# Altium PCB PCB-CPU-fixe1.PcbDoc (part 2 of 3)
Units mil, origin at the board's own origin, x right, y up, seen from the top; angles counter-clockwise.
Board outline 6040 x 4120 mil, 6 copper layers (Top Layer, GND, Mid-Layer2, Mid-Layer3, VDD33, Bottom Layer); 111 components, 315 nets, 963 pads, 730 vias.
Unrouted connection lines stored in the file: 3.
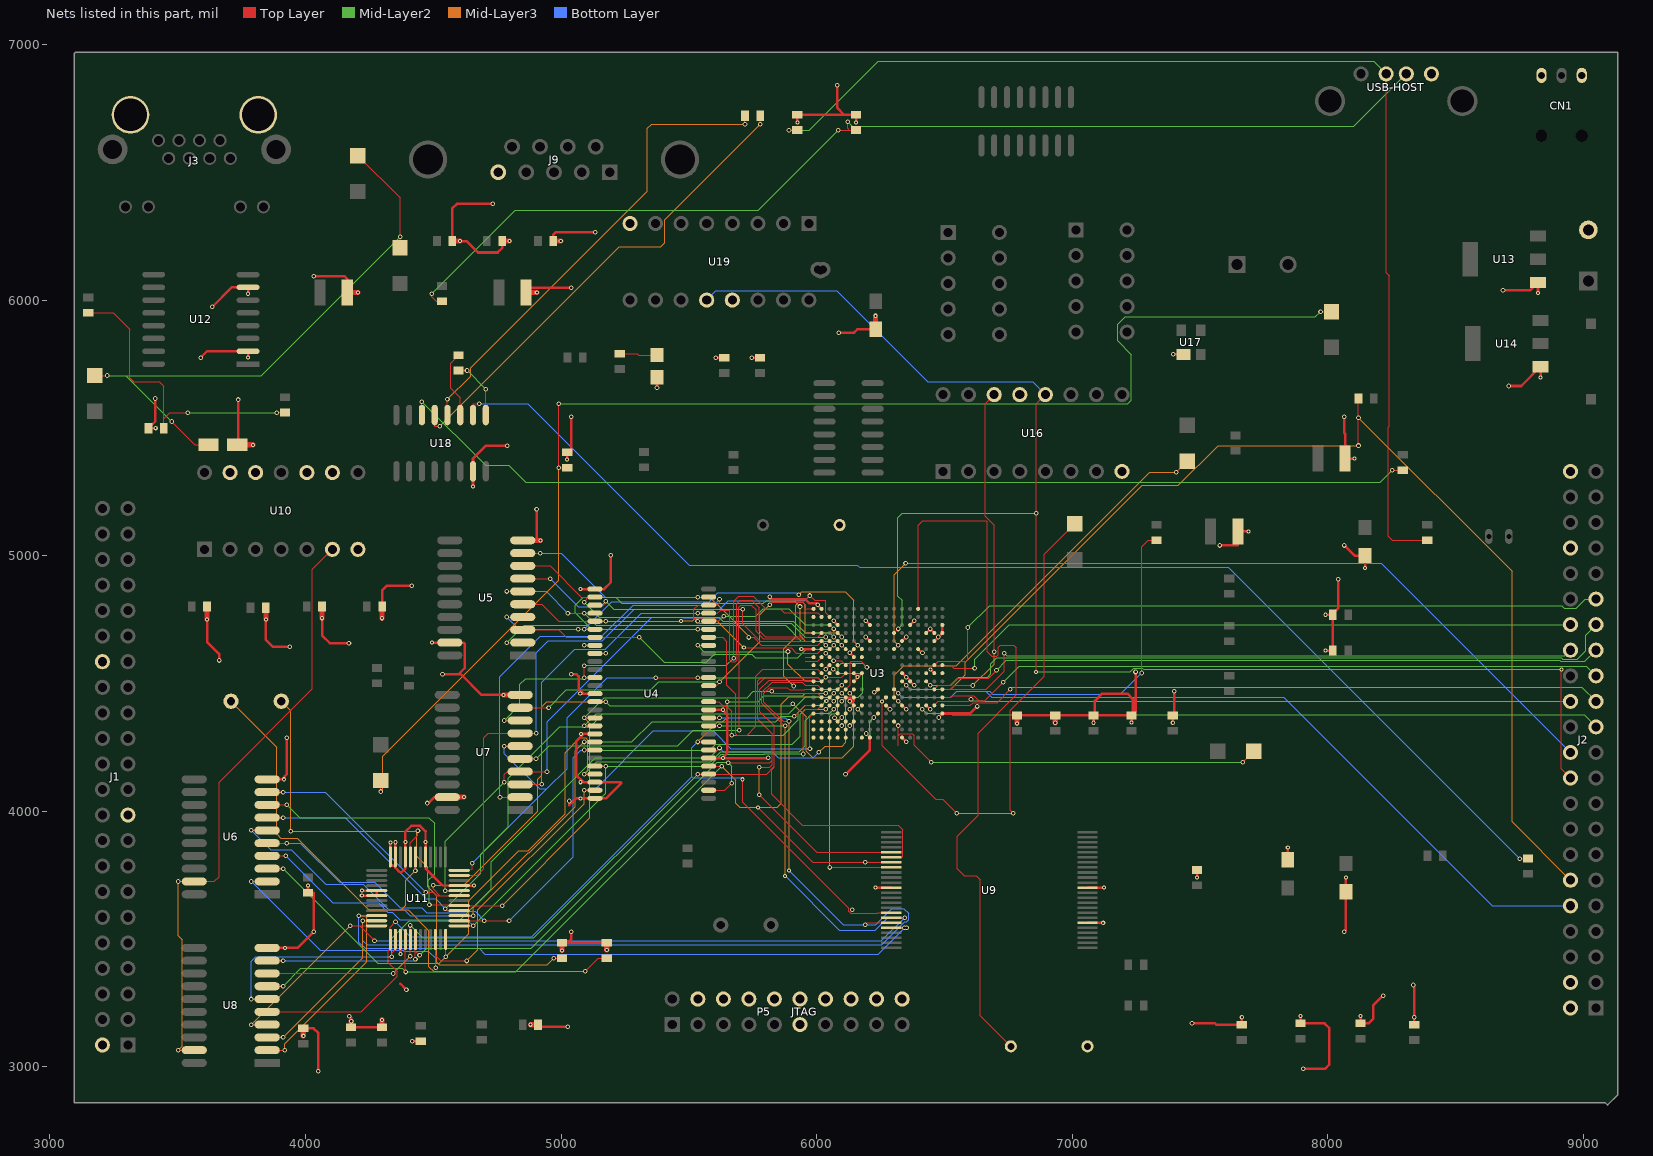
[diagram p6: the nets of this part, all layers, seen from the top]

## Via types
v1: diameter 18, hole 10, Top Layer to Bottom Layer, 574 vias
v2: diameter 16, hole 8, Top Layer to Bottom Layer, 155 vias
v3: diameter 16, hole 12, Top Layer to Bottom Layer, 1 vias

## Nets (pads, with @x,y where several pads share a name; then routed paths per layer and width w, separated by ;. In a path a pad name is that pad's centre, name@x,y a point inside that pad or via, vN(x,y) a via of type N, cw(c..) or ccw(c..) an arc to the next point about the centre after c; other vN are vias at no path point) (continued)
GND: "P5      JTAG.4" "P5      JTAG.6" "P5      JTAG.8" "P5      JTAG.10" "P5      JTAG.11" "P5      JTAG.12" "P5      JTAG.14" "P5      JTAG.16" "P5      JTAG.18" "P5      JTAG.20" C1.1 C2.1 C3.2 C4.2 C5.2 C6.2 C7.2 C8.2 C9.2 C10.2 C11.2 C12.2 C13.2 C14.2 C15.2 C16.2 C17.2 C18.2 C19.2 C20.2 C21.2 C22.2 C23.2 C24.1 C25.2 C26.2 C27.2 C28.2 C29.2 C30.2 C31.2 C32.2 C44.2 C46.2 C47.2 C48.2 C49.2 C50.2 C51.2 C52.2 CN1.1 CN1.3 D1.2 J1.2 J1.19 J1.32 J2.2 J2.4 J2.38 J2.44 J3.13 J3.14 J9.5 R9.1 R18.1 R29.2 R30.2 S2.2 U3.A12 U3.B17 U3.C10 U3.D3 U3.D15 U3.E6 U3.F3 U3.F5 U3.F6 U3.F8 U3.F9 U3.F11 U3.F12 U3.G9 U3.H1 U3.H13 U3.H15 U3.J7 U3.K5 U3.M1 U3.M5 U3.M9 U3.M13 U3.N8 U3.N15 U3.P12 U3.R5 U3.R14 U3.T9 U3.T13 U3.T14 U3.U4 U3.U14 U3.U15 U4.6 U4.12 U4.28 U4.41 U4.46 U4.52 U4.54 U5.10 U5.19 U6.10 U7.10 U7.19 U8.10 U9.6 U9.13 U9.36 U10.7 U10.9 U10.10 U10.12 U10.13 U11.5 U11.6 U11.15 U11.33 U11.41 U11.45 U11.47 U11.48 U12.2 U12.7 U13.1 U14.1 U16.8 U16.13 U17.1 U18.15 U19.8 U19.13 USB-HOST.4 | length 15538.2
  Top Layer w8: v2@6226.22,3701.22 v2(6231.22,3701.22) U9.36@6291.98,3701.22
  Top Layer w9.45: U11.6@4278.58,3669.84 U11.5@4278.58,3689.53 ; U11.48@4331.73,3821.42 4331.73,3786 U11.47@4351.42,3786 ; U11.47@4351.42,3821.42 U11.47@4351.42,3786 ; 4390.79,3920 v2(4390.79,3879.21) U11.45@4390.79,3821.42 4390.79,3776 4376.79,3762 4368,3762 4351.42,3778.58 U11.47@4351.42,3786 ; 4469.53,3921.47 U11.41@4469.53,3821.42 4469.53,3776 4536.32,3709.21 U11.33@4601.42,3709.21
  Top Layer w10: v1(3412,5615) 3412,5525.53 C25.2@3385.26,5498.79 v2(3413.79,5498.79) ; v1(3590,5775) 3615,5800 U12.2@3775,5800 v2(3775,5775) ; C20.2@3614.74,4801.21 v2(3614.74,4749.74) 3614.74,4663 3662,4615.74 v1(3662,4590) ; v1(3635,5974) 3711,6050 U12.7@3775,6050 v2(3775,6025) ; C29.2@3733.23,5433.91 3737,5433.91 v1(3737,5611) ; C21.2@3844.74,4796.21 v2(3844.74,4750.26) 3844.74,4670.26 3872,4643 v1(3938,4643) ; U8.10@3850,3465 v2(3920,3465) 3969,3465 v1(4032,3528) 4032,3680.47 R18.1@4009.58,3680.47 v2(4009.58,3709.58) ; v2(3915,4125) U6.10@3850,4125 3907,4125 3926,4144 v1(3926,4287) ; C24.1@3991.21,3150.26 4032,3150.26 4050,3132.26 v1(4050,2982) ; v1(4032,6094) 4152,6094 4163.15,6082.85 C5.2@4163.15,6030 ; C22.2@4064.74,4801.21 v2(4064.74,4755.26) 4064.74,4688 4094.74,4658 v1(4170,4658) ; v1(4171,3197) 4174,3197 4179,3192 C16.2@4179,3154.74 ; C16.2@4177.58,3154.74 C16.2@4179,3154.74 ; v2(4220.16,3669.84) U11.6@4278.58,3669.84 ; v2(4220.47,3689.53) U11.5@4278.58,3689.53 ; C17.2@4298.79,3154.74 C16.2@4179,3154.74 ; C23.2@4299.74,4801.21 4299.74,4864 4318.74,4883 v1(4415,4883) ; U11.48@4331.73,3821.42 v2(4331.73,3878.27) ; U11.47@4351.42,3821.42 v2(4351.42,3878.58) ; 4371.1,3324.9 v1(4395,3301) ; v2(4371.1,3441.1) U11.15@4371.1,3498.58 ; U11.45@4390.79,3821.42 v2(4390.79,3879.21) ; 4390.79,3920 4413.79,3943 4448,3943 4469.53,3921.47 ; v1(4418.21,3100.26) C15.2@4451.21,3100.26 ; U11.41@4470,3821.89 v2(4470,3880) ; v1(4477,4032) 4481,4032 4504,4055 U7.19@4554.57,4055 ; v2(4495,4660) U5.19@4564.57,4660 4619,4660 4623,4656 4623,4560 4599,4536 ; v1(4536,4536) 4599,4536 ; U11.33@4601.42,3709.21 v2(4659.21,3709.21) ; v2(4655.44,5270.44) U18.15@4655.44,5330.31 4655.44,5380 4705,5429.56 4705,5430 v1(4790,5430) ; v1(4732,6377) 4592,6377 4574.74,6359.74 C7.2@4574.74,6231.21 v2(4603.79,6231.21) 4630.79,6231.21 4675.52,6186.48 4752,6186.48 4769.74,6204.22 C8.2@4769.74,6231.21 ; U7.10@4840,4455 v2(4775,4455) 4689,4455 4608,4536 4599,4536 ; U5.10@4850,5060 4900,5060 4904,5064 v1(4904,5181) ; C3.2@4863.15,6030 4863.15,6048 v1(5040,6048) ; R9.1@4909.53,3164.58 4909.53,3156 v1(5026,3156) ; C9.2@4969.74,6231.21 4969.74,6256 4979.74,6266 v1(5134,6266) ; C50.2@5003.79,3484.74 5024,3484.74 ; v2@5025,5375 v2(5023.79,5376.21) C28.2@5023.79,5404.74 5040,5404.74 v1(5040,5544) ; v1(5032,4040) 5032,4024 5058.55,4050.55 v2(5075.55,4050.55) U4.54@5132.56,4050.55 5176.55,4050.55 5236,4110 5232.46,4113.54 U4.52@5132.56,4113.54 ; v1(5040,3528) 5040,3500.74 5024,3484.74 ; v1(5040,4536) 5061,4536 5069,4528 5069,4479 5088,4460 U4.41@5132.56,4460 v2(5075,4460) ; v2(5075.55,4869.45) U4.28@5132.56,4869.45 5168.45,4869.45 5195,4896 v1(5195,5001) ; v2(5076.46,4113.54) U4.52@5132.56,4113.54 ; v2(5077.52,4302.52) U4.46@5132.56,4302.52 5088,4302.52 5059,4273.52 5059,4142.54 5088,4113.54 U4.52@5132.56,4113.54 ; C51.2@5178.79,3484.74 5024,3484.74 ; v1(5375.5,5657.57) D1.2@5375.5,5698.13 ; v1(5605.79,5774.74) C47.2@5638.79,5774.74 ; v2(5632.99,4397.01) U4.12@5577.44,4397.01 5632,4397.01 5650,4379.01 5650,4226.03 v2@5632,4208.03 ; v1(5745.79,5774.74) C31.2@5778.79,5774.74 ; v1(5811,4209) 5810.03,4208.03 v2(5633.03,4208.03) ; v1(5817,4839) 5817,4831 5819.24,4828.76 5957,4828.76 5972.42,4813.34 5998.16,4813.34 v1(6003.78,4807.72) U3.B17@6019.53,4791.97 ; v2(5924.58,6695.42) R29.2@5924.58,6725.47 6107.53,6725.47 ; v2(5940,4635) 5940.51,4634.49 5954.49,4634.49 U3.A12@5988.03,4634.49 ; v1(6035,4555) 6035,4555.47 U3.C10@6051.02,4571.5 ; v1(6066.77,4744.72) U3.D15@6082.52,4728.98 ; v1(6070,4365) 6082.52,4352.48 U3.D3@6082.52,4351.02 ; v1(6081,6841) 6081,6752 6107.53,6725.47 ; v1(6087,5873) 6146.56,5873 6159,5885.44 C52.2@6231.2,5885.44 ; v1(6098.27,4429.76) U3.E6@6114.02,4445.51 6116.53,4443 6143,4443 U3.F6@6145.51,4445.51 ; v1(6113,4144) 6208.5,4239.5 U3.H1@6208.5,4288.03 6194.26,4302.28 v1(6194.26,4304.26) ; v1(6129.76,4335.28) U3.F3@6145.51,4351.02 ; v1(6129.76,4398.27) U3.F5@6145.51,4414.02 6136,4423.53 6145.51,4433.04 U3.F6@6145.51,4445.51 ; v1(6129.76,4429.76) U3.F6@6145.51,4445.51 ; U3.F8@6145.51,4508.5 6160.51,4523.5 v2(6160.51,4525) ; U3.F9@6145.51,4540 v2(6160.51,4525) ; U3.F11@6145.51,4602.99 6145.51,4604.49 v1(6130,4620) 6131.02,4620 U3.F12@6145.51,4634.49 ; v2(6154.58,6695.42) R30.2@6154.58,6725.47 6107.53,6725.47 ; U3.G9@6177.01,4540 6162.01,4525 v2(6160.51,4525) ; v1(6192.76,4681.73) U3.H13@6208.5,4665.98 ; v1(6192.76,4744.72) U3.H15@6208.5,4728.98 ; v1(6225,4465) 6227.99,4465 U3.J7@6240,4477.01 ; v2(6231.22,3701.22) U9.36@6291.98,3701.22 ; U3.K5@6271.5,4414.02 v1(6287.24,4398.27) ; U3.M1@6334.49,4288.03 v1(6350.24,4272.28) ; U3.M5@6334.49,4414.02 v1(6350.24,4398.27) ; U3.M13@6334.49,4665.98 v1(6350.24,4681.73) ; v1(6350.24,4524.25) U3.M9@6334.49,4540 6338.52,4540 6365.98,4512.54 U3.N8@6365.98,4508.5 v1(6381.73,4492.76) ; U3.N15@6365.98,4728.98 v1(6381.73,4744.72) ; U3.P12@6397.48,4634.49 6412.5,4619.47 v1(6414.47,4619.47) ; U3.R5@6428.98,4414.02 v1(6444.72,4398.27) ; U3.R14@6428.98,4697.48 v1(6444.72,4713.23) U3.T14@6460.47,4697.48 ; v2@6445,4555 v2(6445.47,4555) U3.T9@6460.47,4540 ; U3.T13@6460.47,4665.98 v1(6476.22,4681.73) U3.U14@6491.97,4697.48 U3.U15@6491.97,4728.98 ; v1(6478.21,4366.79) 6478.21,4368.76 U3.U4@6491.97,4382.52 6600.52,4382.52 v1(6628,4410) ; C11.2@6783.79,4374.74 C32.2@6933.79,4374.74 C12.2@7083.79,4374.74 ; U9.6@7060,3563.43 v2(7121.57,3563.43) ; U9.13@7060,3701.22 v2(7125,3701.22) ; v2(7083.79,4346.21) C12.2@7083.79,4374.74 ; v2(7232.58,4347.42) C10.2@7232.58,4374.48 7238,4374.48 C10.2@7238,4380.74 ; v1(7248,4545) 7248,4390.74 C10.2@7238,4380.74 ; v2(7393.79,4346.21) C13.2@7393.79,4374.74 7399,4374.74 v1(7399,4470) ; v1(7394.91,5787.76) U17.1@7435.47,5787.76 ; v1(7469,3170) 7558.74,3170 7564,3164.74 C14.2@7663.79,3164.74 v2(7663.79,3193.79) ; v2(7488.79,3741.21) C44.2@7488.79,3769.74 ; v1(7577,5040) 7648.15,5040 C6.2@7648.15,5095 v2(7690,5095) ; C49.2@7843.8,3809.56 v2(7843.8,3858.8) ; v2(7893.79,3198.79) C26.2@7893.79,3169.74 7988.26,3169.74 8006,3152 8006,3008 7990,2992 v1(7905,2992) ; v2@7990,4630 v2(7991.21,4628.79) C27.2@8020.26,4628.79 C30.2@8020.26,4768.79 ; v2@7990,4770 v2(7991.21,4768.79) C30.2@8020.26,4768.79 ; v1(8042,4907) 8042,4795.74 8020.26,4774 C30.2@8020.26,4768.79 ; v1(8064,3528) 8071.2,3535.2 C48.2@8071.2,3685.44 v2(8071.2,3741.2) ; v1(8064,5040) 8065.44,5040 8105,5000.44 C46.2@8146.2,5000.44 v2(8146.2,4951.2) v2@8145,4950 ; v1(8064,5544) 8064,5481.15 8068.15,5477 C4.2@8068.15,5380 v2(8105,5380) ; v2(8128.79,3198.79) C19.2@8128.79,3169.74 8160,3169.74 8178,3187.74 8178,3239 v1(8217,3278) ; v1(8335,3320) 8339,3320 8339,3164.74 C18.2@8338.79,3164.74 v2(8338.79,3193.79) ; v1(8686,6038) 8791.43,6038 U13.1@8822.87,6069.45 v2(8822.87,6027.87) ; v1(8709,5664) 8757.43,5664 U14.1@8832.87,5739.45 v2(8832.87,5697.13) ; v2@5632,4208.03 v2(5633.03,4208.03) ; v2@5632,4208.03 U4.6@5577.44,4208.03 v2(5633.03,4208.03) ; C12.2@7083.79,4374.74 C12.2@7089,4374.74 ; C12.2@7089,4374.74 7232,4374.74 C10.2@7238,4380.74 ; C12.2@7089,4374.74 7089,4432 7117,4460 7216,4460 7238,4438 C10.2@7238,4380.74
  Top Layer w20: v2(3614.74,4749.74) C20.2@3614.74,4801.21 ; C29.2@3733.23,5433.91 v2(3793.91,5433.91) ; v2(3844.74,4750.26) C21.2@3844.74,4796.21 ; v2(3991.21,3121.21) C24.1@3991.21,3150.26 ; v2(4064.74,4755.26) C22.2@4064.74,4801.21 ; C5.2@4163.15,6030 v2(4205,6030) ; C16.2@4178.79,3155.95 v2(4178.79,3178.79) ; C17.2@4298.79,3154.74 v2(4298.79,3183.79) ; v2(4299.74,4755.26) C23.2@4299.74,4801.21 ; U7.19@4554.57,4055 v2(4620,4055) ; C7.2@4574.74,6231.21 v2(4603.79,6231.21) ; C8.2@4769.74,6231.21 v2(4798.79,6231.21) ; v2(4775,4455) U7.10@4840,4455 ; U5.10@4850,5060 v2(4920,5060) ; C3.2@4863.15,6030 v2(4905,6030) ; v2(4880.42,3164.58) R9.1@4909.53,3164.58 ; C9.2@4969.74,6231.21 v2(4998.79,6231.21) ; v2(5003.79,3455.61) C50.2@5003.79,3484.74 ; v2(5178.79,3456.21) C51.2@5178.79,3484.74 ; C52.2@6231.2,5885.44 v2(6231.2,5938.8) ; v2(6783.79,4343.79) C11.2@6783.79,4374.74 ; v2(6933.79,4346.21) C32.2@6933.79,4374.74
  other v1: 4178.79,3178.79 6140,3615
GPB5: U3.G1
GPB6: U3.G5 | length 44.5
  Top Layer w4: v1(6161.26,4398.27) U3.G5@6177.01,4414.02
  Mid-Layer2 w4: v1(6161.26,4398.27) 6177.01,4382.52
GPC0: U3.J4 | length 141
  Top Layer w4: v1(6224.25,4366.77) U3.J4@6240,4382.52
  Mid-Layer2 w4: 6208.5,4255.16 6209.26,4255.91 6209.26,4310.47 6208.5,4311.22 6208.5,4351.02 v1(6224.25,4366.77)
GPC5: R23.1 U3.K6 | length 2060.4
  Top Layer w4: U3.K6@6271.5,4445.51 v2(6255.98,4430) 6255.98,4255.98 6465.97,4046 6494,4046 v1(6548,3992) ; v1(6769,3992) 6757.79,4003.21 6757.79,4395.74 6890,4527.95 6890,5005 R23.1@7010,5125
  Mid-Layer2 w4: v1(6548,3992) v1(6769,3992)
GPC6: R24.1 U3.L6 | length 1648
  Top Layer w4: U3.L6@6302.99,4445.51 v1(6318.74,4429.76) ; v1(7407,5327) R24.1@7450,5370
  Mid-Layer3 w4: 6334.49,4414.02 v1(6318.74,4429.76) 6303,4445.5 6303,4533 6340.11,4570.11 6547.11,4570.11 7304,5327 v1(7407,5327)
GPC7: R25.1 U3.L3 | length 1582.3
  Top Layer w4: U3.L3@6302.99,4351.02 v1(6318.74,4335.28) 6318.74,4256.26 ; 6318.74,4296 6326.74,4304 6374,4304 6382,4296 6382,4258 v1(6448,4192) ; v1(7667.14,4192) R25.1@7710,4234.86
  Mid-Layer2 w4: v1(6448,4192) v1(7667.14,4192)
GPG0: J2.31 U3.R8 | length 2790.1
  Top Layer w4: U3.R8@6428.98,4508.5 v1(6444.72,4492.76)
  Mid-Layer2 w4: v1(6444.72,4492.76) 6524.84,4492.76 6557.09,4525 6668.87,4525 6681.51,4537.64 6681.51,4577.51 6704,4600 8914,4600 8919.53,4594.47 8976.47,4594.47 9009,4627 9009,4689 J2.31@9050,4730
GPG8: J2.32 U3.U10 | length 2553.1
  Top Layer w4: U3.U10@6491.97,4571.5 6524.84,4571.5 6536.34,4560 v1(6618,4560)
  Mid-Layer2 w4: v1(6618,4560) 6618,4594 6754,4730 J2.32@8950,4730
GPG9: J2.33 U3.T10 | length 2779.1
  Top Layer w4: U3.T10@6460.47,4571.5 6476.22,4587.24 6524.84,4587.24 6585.24,4587.24 6591,4593 v1(6591,4719)
  Mid-Layer2 w4: v1(6591,4719) 6677,4805 8916,4805 8926.53,4794.47 8972.47,4794.47 9008,4830 J2.33@9050,4830
GPH0: J2.20 U3.L14 U16.12 U19.12 | length 6131.5
  Top Layer w4: U3.L14@6302.99,4697.48 v1(6318.74,4713.23) ; v2(6859,4545) v1(6859,5166) 6859,5594 U16.12@6895,5630 ; v2(8915,4554) 8914.47,4553.47 8914.47,4165.53 J2.20@8950,4130
  Mid-Layer2 w4: v1(6318.74,4713.23) 6334.49,4728.98 6334.49,4824.84 6318,4841.33 6318,5148 6336,5166 v1(6859,5166) ; v2(6859,4545) 7226.79,4545 7241.79,4560 7274.21,4560 7279.21,4555 8914,4555 v2(8915,4554) v2@8915,4555
  Bottom Layer w4: U19.12@5570,6000 5606,6036 6079,6036 6435,5680 6845,5680 U16.12@6895,5630
GPH1: J2.22 U3.L12 | length 3275.7
  Top Layer w4: U3.L12@6302.99,4634.49 v1(6318.74,4650.24)
  Mid-Layer3 w4: v1(6318.74,4650.24) 6302.99,4665.98 6302.99,4824.84 6302.99,4924.99 v1(6348,4970)
  Bottom Layer w4: v1(6348,4970) 8210,4970 J2.22@8950,4230
HUSBDN: R29.1 R38.1 USB-HOST.2 | length 4475.8
  Top Layer w4: v1(5892,6665) 5892.47,6665.47 R29.1@5924.58,6665.47 ; USB-HOST.2@8228.77,6885.53 8228.77,6106.23 8240,6095 8240,5506 8237,5503 8237,5075.47 8252,5060.47 R38.1@8389.58,5060.47
  Mid-Layer2 w4: v1(5892,6665) 5972,6665 6241,6934 8180.3,6934 USB-HOST.2@8228.77,6885.53
HUSBDP: R30.1 R39.1 USB-HOST.3 | length 4298.4
  Top Layer w4: v1(4494,6025) 4494,6013.47 4512,5995.47 R39.1@4534.58,5995.47 ; v1(6085,6665.47) 6128,6665.47 ; v1(6121.58,6697.47) 6121.58,6671.89 6128,6665.47 ; R30.1@6154.58,6665.47 6128,6665.47
  Mid-Layer2 w4: v1(4494,6025) 4821,6352 5771.53,6352 v1(6085,6665.47) ; v1(6121.58,6697.47) 6139.05,6680 8101.98,6680 USB-HOST.3@8307.51,6885.53
IICSCL: J2.10 R10.1 U3.L7 | length 4230
  Top Layer w4: U3.L7@6302.99,4477.01 v1(6318.74,4461.26) ; v1(7272,4541) 7272,5035 7297.47,5060.47 R10.1@7329.58,5060.47
  Bottom Layer w4: v1(6318.74,4461.26) 6334.49,4445.51 6524.84,4445.51 6548.33,4469 6661.21,4469 ; v1(7272,4541) 7188,4457 6689,4457 6677,4469 6661.21,4469 ; J2.10@8950,3630 8644,3630 7828.49,4445.51 6684.69,4445.51 6661.21,4469
IICSDA: J2.12 R11.1 U3.M8 | length 4560.8
  Top Layer w4: U3.M8@6334.49,4508.5 v1(6350.24,4492.76) ; v1(8120.47,5431) v1(8120.47,5540) R11.1@8120.47,5615.42
  Mid-Layer3 w4: v1(6350.24,4492.76) 6365.98,4477.01 6524.84,4477.01 6581,4533.17 6581,4582 7275,5276 7416,5276 7571,5431 v1(8120.47,5431) ; v1(8120.47,5540) 8722,4938.47 8722,3958 J2.12@8950,3730
IISLRCK: J2.26 U3.T5 | length 2502.6
  Top Layer w4: U3.T5@6460.47,4414.02 6476.22,4429.76 6524.84,4429.76 6596.24,4429.76 v1(6604.24,4437.76)
  Mid-Layer2 w4: v1(6604.24,4437.76) 6609,4433 6648,4433 6651,4430 J2.26@8950,4430
IISSCLK: J2.23 U3.P5 | length 2687.3
  Top Layer w4: U3.P5@6397.48,4414.02 v1(6413.23,4398.27)
  Mid-Layer2 w4: v1(6413.23,4398.27) 6428.98,4382.52 6524.84,4382.52 6530.36,4377 9003,4377 J2.23@9050,4330
IISSDI: J2.25 U3.U5 | length 2610.2
  Top Layer w4: U3.U5@6491.97,4414.02 6524.84,4414.02 6602.02,4414.02 6613,4425 6706,4425 v1(6758,4477)
  Mid-Layer2 w4: v1(6758,4477) 6766,4485 8995,4485 J2.25@9050,4430
IISSDO: J2.27 U3.U6 | length 2640.9
  Top Layer w4: U3.U6@6491.97,4445.51 6524.84,4445.51 6532.09,4452.76 6614.47,4452.76 6634.24,4433 6658,4433 v1(6730,4505)
  Mid-Layer2 w4: v1(6730,4505) 6793,4568 9012,4568 J2.27@9050,4530
LA0: U3.B14 U7.5 | length 1827.3
  Top Layer w4: U7.5@4840,4205 v1(4902,4205) ; v1(5698,4317) 5698,4622 5696,4624 5696,4799 5704,4807 5744,4807 5763,4788 5763,4703.97 5792,4674.97 5948.4,4674.97 5955.16,4681.73 6003.78,4681.73 U3.B14@6019.53,4697.48
  Mid-Layer2 w4: v1(4902,4205) 4953,4256 5457,4256 5518,4317 v1(5698,4317)
LA1: U3.D14 U4.23 U7.4 U11.32 | length 2399.4
  Top Layer w4: v1(4547,3689.53) U11.32@4601.42,3689.53 ; v1(4778,4114) 4778,4144 4789,4155 U7.4@4840,4155 v1(4945,4155) ; U4.23@5577.44,4743.46 5616,4743.46 v1(5636,4763.46) ; v1(6066.77,4713.23) U3.D14@6082.52,4697.48
  Mid-Layer2 w4: v1(4547,3689.53) 4547,3883 v1(4778,4114) ; v1(5636,4763.46) 5761.46,4763.46 5791,4793 5891.13,4793 5955.16,4728.98 6051.02,4728.98 v1(6066.77,4713.23)
  Bottom Layer w4: v1(4945,4155) 4945,4350 5354,4759 5475.8,4759 5476.8,4758 5630.54,4758 v1(5636,4763.46)
LA2: U3.A14 U4.24 U7.3 | length 2211.6
  Top Layer w4: U7.3@4840,4105 v1(4924,4105) ; v1(5535,4775) v1(5535,4775) U4.24@5577.44,4774.96 5611.96,4774.96 5624,4787 5659,4787 5660,4786 5660,4592 5668,4584 5682,4584 5690,4592 5690,4614 5688,4616 5688,4812 5702,4826 5746,4826 5776.19,4795.81 5776.19,4705.29 5798.51,4682.97 5940.65,4682.97 5955.16,4697.48 U3.A14@5988.03,4697.48
  Bottom Layer w4: v1(4924,4105) 4925,4106 4925,4504 5054,4633 5172,4633 5314,4775 v1(5535,4775)
LA3: U3.C13 U4.25 U7.2 | length 2261.7
  Top Layer w4: v1(4761,4055) U7.2@4840,4055 ; v1(5534,4743) 5520,4757 5520,4790.46 5536,4806.46 U4.25@5577.44,4806.46 5610.46,4806.46 5620,4816 v1(5620,4830) ; v1(6035.28,4681.73) U3.C13@6051.02,4665.98
  Mid-Layer2 w4: v1(5534,4743) 5541,4736 5900.89,4736 5955.16,4681.73 v1(6035.28,4681.73)
  Bottom Layer w4: v1(4761,4055) 4761,4526 4919,4684 5160,4684 5282,4806 5596,4806 v1(5620,4830)
LA4: U3.B13 U4.26 U5.9 | length 1371
  Top Layer w4: U5.9@4850,5010 v1(4919,5010) ; v1(5535.05,4838) 5535.1,4837.95 U4.26@5577.44,4837.95 ; v1(5735,4680) 5753.69,4680 5783.69,4650 5955,4650 6003.54,4650 U3.B13@6019.53,4665.98
  Mid-Layer3 w4: v1(5535.05,4838) 5582,4838 5641.54,4778.46 5642.21,4778.46 5735,4685.68 v1(5735,4680)
  Bottom Layer w4: v1(4919,5010) 5000,5010 5172,4838 v1(5535.05,4838)
LA5: U3.D13 U4.29 U5.8 | length 1413.1
  Top Layer w4: U5.8@4850,4960 4957,4960 5079.05,4837.95 5101,4837.95 ; v1(5090,4818) 5101,4829 5101,4837.95 ; U4.29@5132.56,4837.95 5101,4837.95 ; v1(6066.77,4681.73) U3.D13@6082.52,4665.98
  Mid-Layer2 w4: v1(5090,4818) 5149,4759 5617,4759 5632,4744 5908.64,4744 5955.16,4697.48 6051.02,4697.48 v1(6066.77,4681.73)
LA6: U3.A13 U4.30 U5.7 | length 1343.2
  Top Layer w4: U5.7@4850,4910 v1(4958,4910) ; U4.30@5132.56,4806.46 5165.54,4806.46 5175.09,4816 v1(5175.09,4822.46) ; v1(5711,4791) 5711,4734 5779.02,4665.98 5955.98,4665.98 U3.A13@5988.03,4665.98
  Mid-Layer2 w4: v1(5175.09,4822.46) 5206.54,4791 v1(5711,4791)
  Bottom Layer w4: v1(4958,4910) 5067,4801 5153.63,4801 v1(5175.09,4822.46)
LA7: U3.C12 U4.31 U5.6 | length 1461
  Top Layer w4: v1(4788,4860) U5.6@4850,4860 ; v1(5027,4774.96) v1(5090.03,4774.96) U4.31@5132.56,4774.96 ; v1(6035.28,4650.24) U3.C12@6051.02,4634.49
  Mid-Layer2 w4: v1(5090.03,4774.96) 5136.99,4728 5878.32,4728 5940.33,4665.98 5955.16,4665.98 6019.53,4665.98 v1(6035.28,4650.24)
  Bottom Layer w4: v1(4788,4860) 4941.96,4860 v1(5027,4774.96)
LA8: U3.B12 U4.32 U5.5 | length 1267.3
  Top Layer w4: U5.5@4850,4810 4924.46,4810 4991,4743.46 U4.32@5132.56,4743.46 v1(5175.09,4743.46) ; v2(5715,4640) 5900,4640 5921.26,4618.74 5955,4618.74 6003.78,4618.74 U3.B12@6019.53,4634.49
  Mid-Layer2 w4: v1(5175.09,4743.46) 5468.46,4743.46 v2(5470,4745)
  Mid-Layer3 w4: v2(5470,4745) 5514.79,4745 5527.79,4758 5597,4758 v2(5715,4640)
LA9: U3.G12 U4.33 U5.4 | length 1766.3
  Top Layer w4: v1(4788,4760) U5.4@4850,4760 ; v1(5066.97,4711.97) v1(5090.03,4711.97) U4.33@5132.56,4711.97 ; v1(6161.26,4650.24) U3.G12@6177.01,4634.49
  Mid-Layer3 w4: v1(5930,4847) 5942.16,4859.16 6111.19,4859.16 6145.51,4824.84 6145.51,4665.98 v1(6161.26,4650.24)
  Bottom Layer w4: v1(4788,4760) 4836.03,4711.97 v1(5066.97,4711.97) ; v1(5090.03,4711.97) 5198.06,4820 5580,4820 5614,4854 5923,4854 v1(5930,4847)
LA10: U3.D12 U4.34 U5.3 | length 1330.3
  Top Layer w4: U5.3@4850,4710 4991,4710 5020.53,4680.47 U4.34@5132.56,4680.47 v1(5306,4680.47) ; v1(6066.77,4650.24) U3.D12@6082.52,4634.49
  Mid-Layer2 w4: v1(5306,4680.47) 5403.47,4583 5568,4583 5599,4614 5747,4614 5760,4601 5926.51,4601 5960,4634.49 6051.02,4634.49 v1(6066.77,4650.24)
LA11: U3.E12 U4.22 U5.2 | length 2216.8
  Top Layer w4: v1(4788,4660) U5.2@4850,4660 ; v1(5535,4712) U4.22@5577.44,4711.97 ; v1(6098.27,4650.24) U3.E12@6114.02,4634.49
  Mid-Layer2 w4: v1(4788,4660) 4855,4727 5105,4727 ; v1(5535,4712) 5120,4712 5105,4727 ; v1(5935,4801) 5912.51,4823.49 5802,4823.49 5791.51,4813 5238,4813 5213,4838 5087,4838 5056,4807 5056,4776 5105,4727
  Mid-Layer3 w4: v1(5935,4801) 5935,4686.14 5955.16,4665.98 6082.52,4665.98 v1(6098.27,4650.24)
LA12: U3.B11 U4.35 | length 113.4
  Top Layer w4: v1(5090.03,4648.98) U4.35@5132.56,4648.98 ; 5955.16,4587.24 6003.78,4587.24 U3.B11@6019.53,4602.99
LA13: U3.A11 U4.36 | length 75.4
  Top Layer w4: U4.36@5132.56,4617.48 v1(5175.09,4617.48) ; 5955.16,4602.99 U3.A11@5988.03,4602.99
LA14: U3.C11 | length 22.3
  Top Layer w4: v1(6035.28,4618.74) U3.C11@6051.02,4602.99
LA15: U3.G11
LA16: U3.A10
LA17: U3.B10
LA18: U3.E10 | length 54.9
  Top Layer w4: v1(6066.28,4588.72) 6096.79,4588.72 U3.E10@6114.02,4571.5
LA19: U3.D10
LA20: U3.F10
LA21: U3.A9
LA22: U3.D9 | length 23.6
  Top Layer w4: v1(6065.27,4555.27) 6067.25,4555.27 U3.D9@6082.52,4540
LA23: U3.E9 U4.20 | length 722.2
  Top Layer w4: v1(5535,4649) U4.20@5577.44,4648.98 ; v1(6035,4525) 6099.02,4525 U3.E9@6114.02,4540
  Mid-Layer2 w4: v1(5535,4649) 5559,4625 v1(5888,4625)
  Mid-Layer3 w4: v1(5888,4625) 5888,4575.66 5955.16,4508.5 6019.53,4508.5 6035,4523.98 v1(6035,4525)
LA24: U3.B9 U4.21 | length 1019.2
  Top Layer w4: U4.21@5577.44,4680.47 5632,4680.47 5649,4663.47 5649,4492 5683,4458 5683,4303 5688,4298 5728,4298 5762,4332 5762,4528 5789,4555 5955,4555 6004.53,4555 U3.B9@6019.53,4540
LA25: U3.C9
LA26: U3.E8 | length 171.9
  Top Layer w4: v1(6098.27,4492.76) U3.E8@6114.02,4508.5
  Mid-Layer3 w4: 5955.16,4477.01 6082.52,4477.01 v1(6098.27,4492.76)
LDATA0: U3.B8 U4.2 U8.9 U9.29 U11.18 | length 4221
  Top Layer w4: U8.9@3850,3415 v1(3912,3415) ; v1(4430.16,3420.24) 4430.16,3452.24 ; U11.18@4430.16,3498.58 4430.16,3452.24 ; v1(4446.16,3436.24) 4430.16,3452.24 ; U4.2@5577.44,4082.05 5640.05,4082.05 v1(5668,4110) ; v1(5654,4190) 5816,4190 5826,4200 ; v1(5776,4064) 6000.98,3839.02 U9.29@6291.98,3839.02 ; v1(5776,4172) 5817,4172 5826,4181 5826,4200 ; 5770,4495.55 5770,4510 5783,4523 5797.45,4523 ; 5770,4495.55 5770,4359 5826,4303 5826,4200 ; 5770,4495.55 5797.45,4523 ; 5797.45,4523 6005.03,4523 U3.B8@6019.53,4508.5 6003.78,4524.25 5955.16,4524.25 5798.7,4524.25 5797.45,4523
  Mid-Layer2 w4: v1(4446.16,3436.24) 4473.91,3464 4884,3464 5612,4192 5652,4192 v1(5654,4190) 5668,4176 v1(5668,4110)
  Mid-Layer3 w4: v1(5776,4064) v1(5776,4172)
  Bottom Layer w4: v1(3912,3415) 4424.91,3415 v1(4430.16,3420.24)
LDATA1: U3.A8 U4.4 U8.8 U9.30 U11.17 | length 3858.1
  Top Layer w4: U8.8@3850,3365 v1(4343,3365) ; v1(4410.47,3432.47) U11.17@4410.47,3498.58 v1(4410.47,3552.92) ; v1(5535,4145.04) U4.4@5577.44,4145.04 5804,4145.04 5834,4175.04 ; U9.30@6291.98,3819.33 6333.33,3819.33 6338,3824 6338,3928 6320,3946 5944,3946 5824,4066 5824,4162 5834,4172 5834,4175.04 ; 5834,4175.04 5834,4334 5778,4390 5778,4477 5814,4513 5950.66,4513 ; 5950.66,4513 5983.54,4513 U3.A8@5988.03,4508.5 5955.16,4508.5 5950.66,4513
  Mid-Layer2 w4: v1(4410.47,3552.92) 4459.39,3504 4893.96,3504 v1(5535,4145.04)
  Mid-Layer3 w4: v1(4343,3365) v1(4410.47,3432.47)
LDATA2: U3.D7 U4.5 U8.7 U9.31 U11.16 | length 3929.5
  Top Layer w4: U8.7@3850,3315 v1(3912,3315) ; U11.16@4390.79,3498.58 4390.79,3372.21 v1(4392,3371) ; U4.5@5577.44,4176.54 v1(5628,4176.54) ; v2(5770,4015) 5985,3800 v1(6190,3800) 6190.35,3799.65 U9.31@6291.98,3799.65 ; v1(6066.77,4461.26) U3.D7@6082.52,4477.01
  Mid-Layer2 w4: v1(3912,3315) 3982,3385 4378,3385 v1(4392,3371) 4822.46,3371 v1(5628,4176.54)
  Mid-Layer3 w4: v1(5628,4176.54) 5683,4121.54 5683,4032 5699,4016 5846,4016 5862,4032 5862,4419 5890.19,4447.19 5956.84,4447.19 6009.02,4447.19 6010.7,4445.51 6031.79,4445.51 6032.6,4446.32 6045.02,4446.32 6045.83,4445.51 6051.02,4445.51 v1(6066.77,4461.26)
LDATA3: U3.E7 U4.7 U8.6 U9.32 U11.14 | length 4907.5
  Top Layer w4: v1(3788,3265) U8.6@3850,3265 ; v1(4338,3430.37) 4338,3443.79 4351.42,3457.21 U11.14@4351.42,3498.58 ; U4.7@5577.44,4239.53 5612,4239.53 v1(5620,4247.53) ; v1(6052,3779.96) U9.32@6291.98,3779.96 ; v1(6098.27,4461.26) U3.E7@6114.02,4477.01 6131,4493.99 6131,4582 6136,4587 6174,4587 v1(6197,4564)
  Mid-Layer2 w4: v1(4338,3430.37) 4338,3503 4406,3571 4602,3571 4726,3695 4726,3803 5133,4210 5582.47,4210 v1(5620,4247.53) ; v1(6052,3779.96) 6052,4372.18 6061.45,4381.63 6072.63,4381.63 6083,4392 6083,4441 6088,4446 6163,4446 6181,4464 6181,4538.44 6179.44,4540 6089,4540 6085,4544 6085,4569 6096,4580 6181,4580 v1(6197,4564)
  Mid-Layer3 w4: v1(6009,4231.16) 6033,4255.16 6100.16,4255.16 6114.02,4269.02 6114.02,4445.51 v1(6098.27,4461.26)
  Bottom Layer w4: v1(3788,3265) 3788,3413 3805.37,3430.37 v1(4338,3430.37) ; v1(5620,4247.53) 5635.53,4232 5827,4232 5850,4209 5986.84,4209 v1(6009,4231.16)
LDATA4: U3.C7 U4.8 U8.5 U9.41 U11.13 | length 4134.8
  Top Layer w4: U8.5@3850,3215 4218,3215 4358,3355 4358,3373 4323,3408 4323,3454.27 4331.73,3463 U11.13@4331.73,3498.58 4331.73,3546.52 v1(4352,3566.79) ; v1(5535,4271.02) U4.8@5577.44,4271.02 ; v2(5710,4125) 5710,4035 6125,3620 6125,3608.79 6133.79,3600 6236.69,3600 6239.48,3602.8 U9.41@6291.98,3602.8 ; v1(6035.28,4461.32) v1(6035.28,4461.32) U3.C7@6051.02,4477.01
  Mid-Layer2 w4: v1(5650,4429) 5771,4429 5794,4452 5945.9,4452 5955.16,4461.26 v1(6035.28,4461.32) v1(6035.28,4461.32)
  Mid-Layer3 w4: v1(5535,4271.02) 5613.98,4350 5632,4350 5650,4368 v1(5650,4429)
  Bottom Layer w4: v1(4352,3566.79) 4409.79,3509 4886,3509 5512,4135 ; v1(5535,4271.02) 5512,4248.02 5512,4135 ; v2(5710,4125) 5704.96,4130.04 5516.96,4130.04 5512,4135
LDATA5: U3.B7 U4.10 U8.4 U9.42 U11.12 | length 4856.6
  Top Layer w4: v1(3788,3165) U8.4@3850,3165 ; v1(4174.73,3551.73) 4211.27,3551.73 ; v1(4270,3493) 4211.27,3551.73 ; U11.12@4278.58,3551.73 4211.27,3551.73 ; U4.10@5577.44,4334.02 v1(5620.02,4334) ; v1(5877,4334) 5874,4334 5786,4422 5786,4465.31 5825.69,4505 5942.91,4505 5955.16,4492.76 6003.78,4492.76 U3.B7@6019.53,4477.01 ; U9.42@6291.98,3583.11 v1(6344.48,3583.11)
  Mid-Layer2 w4: v1(5620.02,4334) v1(5877,4334)
  Mid-Layer3 w4: v1(3788,3165) v1(4174.73,3551.73) ; v2@5875,3745 v2(5877,3747) v1(5877,4334)
  Bottom Layer w4: v1(4270,3493) 6253.89,3493 v1@6344,3583.11 ; v2(5877,3747) 6089,3535 6230,3535 6278.11,3583.11 v1@6344,3583.11 ; v1(6344.48,3583.11) v1@6344,3583.11
LDATA6: U3.A7 U4.11 U8.3 U9.43 U11.11 | length 4964.8
  Top Layer w4: U8.3@3850,3115 v1(3912,3115) ; v1(4224,3571) 4224.42,3571.42 U11.11@4278.58,3571.42 ; U4.11@5577.44,4365.51 5619.51,4365.51 v1(5620,4366) ; v1(5892,4351.45) 5868.55,4351.45 5794,4426 5794,4462 5816,4484 5885.92,4484 5895,4474.92 5953.07,4474.92 5955.16,4477.01 U3.A7@5988.03,4477.01 ; v1(6190,3555) 6198.43,3563.43 U9.43@6291.98,3563.43
  Mid-Layer3 w4: v1(3912,3115) 4224,3427 v1(4224,3571) ; v1(5892,4351.45) v2(5892,3768) v2@5895,3765
  Bottom Layer w4: v1(4224,3571) 4224,3494 4241,3477 6255,3477 6345,3567 6352,3567 6360,3575 6360,3600 6341,3619 6294.57,3619 6230.57,3555 v1(6190,3555) 6105,3555 v2(5892,3768) ; v1(5620,4366) 5877.45,4366 v1(5892,4351.45)
LDATA7: U3.C6 U4.13 U8.2 U9.44 U11.10 | length 3847.2
  Top Layer w4: U8.2@3850,3065 v1(3918,3065) ; v1(4209,3591.1) U11.10@4278.58,3591.1 ; U4.13@5577.44,4428.5 5617.5,4428.5 5635,4411 5648,4411 5668,4391 v1(5668,4298) ; v2(6037.83,4431.75) 6037.83,4432.32 U3.C6@6051.02,4445.51 ; U9.44@6291.98,3543.74 v1(6344,3543.74) v1(6352.48,3543.74)
  Mid-Layer2 w4: v1(5668,4298) 5869.14,4298 5928.14,4357 5928.14,4387 5955.16,4414.02 6019.53,4414.02 v2@6037.27,4431.75 ; v2@6035,4430 6036.75,4431.75 v2@6037.27,4431.75 ; v2(6037.83,4431.75) v2@6037.27,4431.75
  Mid-Layer3 w4: v1(3918,3065) 3918,3090 4239,3411 4239,3584 4231.9,3591.1 v1(4209,3591.1)
  Bottom Layer w4: v1(4209,3591.1) 4209,3488 4233.9,3463.1 4678.9,3463.1 4701,3441 6241.26,3441 v1(6344,3543.74)
LDATA8: U3.F7 U4.42 U6.9 U11.31 | length 3617
  Top Layer w4: U6.9@3850,4075 v1(3912,4075) ; v1(4470,3682.84) 4500.16,3682.84 4513.16,3669.84 4526.16,3669.84 ; v1(4499.21,3710) 4499.21,3696.79 4526.16,3669.84 ; U11.31@4601.42,3669.84 4526.16,3669.84 ; U4.42@5132.56,4428.5 v1(5175.09,4428.5) ; v1(6129.76,4461.26) U3.F7@6145.51,4477.01
  Mid-Layer2 w4: v1(5175.09,4428.5) 5190.59,4413 5899,4413 v1(5907,4421)
  Mid-Layer3 w4: v1(4499.21,3710) 4619,3710 4909,4000 4909,4126 4924,4141 4924,4409 4943.5,4428.5 v1(5175.09,4428.5) ; v1(5907,4421) 5959,4369 5959,4235 5984,4210 6100.35,4210 6145.51,4255.16 6145.51,4445.51 v1(6129.76,4461.26)
  Bottom Layer w4: v1(3912,4075) 4077.84,4075 v1(4470,3682.84)
LDATA9: U3.B6 U4.44 U6.8 U11.29 | length 3213.5
  Top Layer w4: U6.8@3850,4025 v1(3926,4025) ; v1(4485,3633.79) 4558.76,3633.79 4562.08,3630.47 U11.29@4601.42,3630.47 v1(4770,3630.47) ; v1(5090.03,4365.51) U4.44@5132.56,4365.51 ; v1(5824,4469) 5831.74,4461.26 5955.16,4461.26 6003.78,4461.26 U3.B6@6019.53,4445.51
  Mid-Layer2 w4: v1(3926,4025) 3977,3974 4483,3974 4505,3952 4505,3754 4480,3729 4480,3709 4485,3704 v1(4485,3633.79) ; v1(5090.03,4365.51) 5168.52,4444 5728,4444 5753,4469 v1(5824,4469)
  Mid-Layer3 w4: v1(4770,3630.47) 5113.03,3973.51 5113.03,4342.51 v1(5090.03,4365.51)
LDATA10: U3.D6 U4.45 U6.7 U11.28 | length 3086.1
  Top Layer w4: U6.7@3850,3975 v1(3912,3975) ; v1(4547.08,3618.79) 4555.08,3610.79 U11.28@4601.42,3610.79 ; v1(5090,4334.02) U4.45@5132.56,4334.02 ; v1(6066.77,4429.76) U3.D6@6082.52,4445.51
  Mid-Layer2 w4: v1(4547.08,3618.79) 4685,3756.71 4685,3831 4793,3939 4793,4129 4995,4331 5114,4331 5164,4381 ; v1(5090,4334.02) 5136.98,4381 5164,4381 ; v1(6066.77,4429.76) 6050.21,4446.32 6032.6,4446.32 6031.79,4445.51 6010.7,4445.51 6009.02,4447.19 5956.84,4447.19 5890.65,4381 5164,4381
  Bottom Layer w4: v1(3912,3975) 4155,3975 4473,3657 4508.87,3657 v1(4547.08,3618.79)
LDATA11: U3.A5 U4.47 U6.6 U11.27 | length 2984
  Top Layer w4: v1(3788,3925) U6.6@3850,3925 ; U11.27@4601.42,3591.1 v1(4655.76,3591.1) ; v1(5090.03,4271.02) U4.47@5132.56,4271.02 ; v1(5913.14,4372) 5955.16,4414.02 U3.A5@5988.03,4414.02
  Mid-Layer2 w4: v1(5090.03,4271.02) 5277.02,4271.02 5356,4350 5840,4350 5862,4372 v1(5913.14,4372)
  Mid-Layer3 w4: v1(4655.76,3591.1) 4655.76,3621.76 4872,3838 4875.48,3838 5055,4017.52 5055,4235.99 v1(5090.03,4271.02)
  Bottom Layer w4: v1(3788,3925) 3863,3850 3944,3850 4080,3714 4226.61,3714 4326.51,3614.1 4386.89,3614.1 4409.9,3591.1 v1(4655.76,3591.1)
LDATA12: U3.C5 U4.48 U6.5 U11.26 | length 3099
  Top Layer w4: U6.5@3850,3875 v1(3927,3875) ; U11.26@4601.42,3571.42 v1(4700,3571.42) v1(4796.42,3571.42) ; v1(5090.03,4239.53) U4.48@5132.56,4239.53 ; v1(6035.28,4398.27) U3.C5@6051.02,4414.02
  Mid-Layer2 w4: v1(5090.03,4239.53) 5581.97,4239.53 5604.97,4262.53 5904.53,4262.53 5936.14,4294.14 5936.14,4379.25 5955.16,4398.27 v1(6035.28,4398.27)
  Bottom Layer w4: v1(3927,3875) 3980,3875 4133,3722 4271,3722 4370,3623 4454,3623 4475,3602 4637.42,3602 4643.42,3608 4663.42,3608 v1(4700,3571.42) ; v1(4796.42,3571.42) 5047,3822 5047,4210 5076.53,4239.53 v1(5090.03,4239.53)
LDATA13: U3.B5 U4.50 U6.4 U11.25 | length 2895.8
  Top Layer w4: U6.4@3850,3825 v1(3923,3825) ; U11.25@4601.42,3551.73 v1(4655.76,3551.73) ; U4.50@5132.56,4176.54 v1(5175.09,4176.54) ; v1(5947,4224) 5947,4390.11 5955.16,4398.27 6003.78,4398.27 U3.B5@6019.53,4414.02
  Mid-Layer2 w4: v1(4655.76,3551.73) 5175,4070.98 5175,4176.45 v1(5175.09,4176.54) 5580.54,4176.54 5627,4223 5795,4223 5796,4224 v1(5947,4224)
  Bottom Layer w4: v1(3923,3825) 4107,3641 4286,3641 4322,3605 4339,3605 4368,3576 4631.49,3576 v1(4655.76,3551.73)
LDATA14: U3.D5 U4.51 U6.3 U11.24 | length 3405.1
  Top Layer w4: U6.3@3850,3775 v1(3912,3775) ; v1(4548.27,3430) U11.24@4548.27,3498.58 ; v1(5090.03,4145.04) U4.51@5132.56,4145.04 ; v1(6066.77,4398.27) U3.D5@6082.52,4414.02
  Mid-Layer2 w4: v1(3912,3775) 4282,3405 4523.27,3405 v1(4548.27,3430) ; v1(5090.03,4145.04) 5138.99,4194 5586.69,4194 5624.69,4232 5931.16,4232 5955,4255.84 5955,4355 5982.52,4382.52 6051.02,4382.52 v1(6066.77,4398.27)
  Mid-Layer3 w4: v1(4548.27,3430) 4638,3519.73 4638,3648.69 4835.31,3846 4872,3846 5016,3990 5016,4229 5074,4287 5096,4287 5105.03,4277.97 5105.03,4160.04 v1(5090.03,4145.04)
LDATA15: U3.A4 U4.53 U6.2 U11.22 | length 3237.4
  Top Layer w4: v1(3788,3725) U6.2@3850,3725 ; v1(4508.9,3388) 4508.9,3434.1 ; U11.22@4508.9,3498.58 4508.9,3434.1 ; v1(4631,3414) 4529,3414 4508.9,3434.1 ; v1(5090,4082) v1(5090,4082) U4.53@5132.56,4082.05 ; v1(5974,4245) 5974,4368.49 U3.A4@5988.03,4382.52
  Mid-Layer3 w4: v1(4631,3414) 4674,3457 4674,3613.5 5090,4029.5 v1(5090,4082)
  Bottom Layer w4: v1(3788,3725) 4057.9,3455.1 4382.9,3455.1 4385,3453 4480,3453 4508.9,3424.1 v1(4508.9,3388) ; v1(5090,4082) 5129,4082 5361,4314 5595,4314 5664,4245 v1(5974,4245)
LDATA16: U3.A3
LDATA17: U3.B3
LDATA18: U3.A2
LDATA19: U3.A1
LDATA20: U3.B2
LDATA21: U3.C3
LDATA22: U3.B1
LDATA23: U3.C2
LDATA24: U3.C1
LDATA25: U3.D2
LDATA26: U3.D4
LDATA27: U3.D1
LDATA28: U3.E3 | length 22.3
  Top Layer w4: v1(6098.27,4335.28) U3.E3@6114.02,4351.02
LDATA29: U3.E2
LDATA30: U3.E4 | length 44.5
  Top Layer w4: v1(6098.27,4366.77) U3.E4@6114.02,4382.52
  Mid-Layer2 w4: 6082.52,4351.02 v1(6098.27,4366.77)
LDATA31: U3.E1
LNOE: U3.C16 U7.7 U11.35 | length 2451.8
  Top Layer w4: U11.35@4601.42,3748.58 4672,3748.58 4698,3774.58 4698,4288 4715,4305 U7.7@4840,4305 v1(4902.21,4305) ; v1(5973,4844) 5992.16,4824.84 6035.28,4824.84 6035.28,4776.22 U3.C16@6051.02,4760.47
  Bottom Layer w4: v1(4902.21,4305) 4902.21,4620.21 4949,4667 5162,4667 5286,4791 5621.54,4791 5654.02,4823.49 5952.49,4823.49 v1(5973,4844)
LNWBE0: U3.A17 U4.15 U7.9 | length 1449.9
  Top Layer w4: U7.9@4840,4405 v1(4951,4405) ; U4.15@5577.44,4491.5 5608,4491.5 5620,4503.5 v1(5620,4507) ; v1(5817,4808) 5826,4817 5945.33,4817 5955.16,4807.17 5955.16,4791.97 U3.A17@5988.03,4791.97
  Mid-Layer2 w4: v1(4951,4405) 5021,4475 5350,4475 5382,4507 v1(5620,4507)
  Mid-Layer3 w4: v1(5620,4507) 5777,4664 5777,4768 v1(5817,4808)
LNWBE1: U3.B16 U4.39 U7.8 | length 1786
  Top Layer w4: v1(4778,4355) U7.8@4840,4355 ; v1(5090,4570) v1(5090,4523) U4.39@5132.56,4522.99 ; v1(5675,4599) 5675,4821 5696,4842 5751.23,4842 5802.23,4791 5858.88,4791 5873.66,4776.22 5955.16,4776.22 6003.78,4776.22 U3.B16@6019.53,4760.47
  Mid-Layer2 w4: v1(4778,4355) 4839,4416 4839,4496 4862,4519 5086,4519 v1(5090,4523) ; v1(5090,4570) 5091,4571 5647,4571 v1(5675,4599)
LNWBE2: U3.C15
LNWBE3: U3.A16
LNWE: U3.E13 U4.16 U7.6 U11.36 | length 2799.1
  Top Layer w4: U11.36@4601.42,3768.27 4653,3773.27 v1(4653,3796) ; v1(4777.79,4255) U7.6@4840,4255 ; v1(5371,4523) 5535.3,4523 v1(5535.38,4523) U4.16@5577.44,4522.99 ; v1(6098.27,4681.73) U3.E13@6114.02,4665.98
  Mid-Layer2 w4: v1(5535.38,4523) 5877,4523 v1(5910,4490)
  Mid-Layer3 w4: v1(5910,4490) 5872,4528 5872,4634.97 5919,4681.97 5919,4807 5929,4817 5946.16,4817 5955.16,4808 5955.16,4697.48 6082.52,4697.48 v1(6098.27,4681.73)
  Bottom Layer w4: v1(4653,3796) 4944,4087 ; v1(4777.79,4255) 4777.79,4225.21 4916,4087 4944,4087 ; v1(5371,4523) 5181,4523 5024,4366 5024,4167 4944,4087
MISO0: J2.29 U3.T7 | length 2656.2
  Top Layer w4: U3.T7@6460.47,4477.01 6476.22,4492.76 6524.84,4492.76 6553.02,4520.93 6672.93,4520.93 v1(6704,4552)
  Mid-Layer2 w4: v1(6704,4552) 6742,4590 8907.47,4590 8911.47,4586 9006,4586 J2.29@9050,4630
MISO1: U3.U9
MOSI0: J2.30 U3.U7 U16.14 | length 3865.1
  Top Layer w4: U3.U7@6491.97,4477.01 6524.84,4477.01 ; v1(6611,4492) 6539.83,4492 6524.84,4477.01 ; v1(6695,4624) 6695,5119 6659,5155 6659,5594 U16.14@6695,5630 ; v1(6734,4617.53) 6734,4547.8 6663.21,4477.01 6524.84,4477.01
  Mid-Layer2 w4: v1(6734,4617.53) 6743.53,4608 8928,4608 J2.30@8950,4630
  Mid-Layer3 w4: v1(6611,4492) 6695,4576 v1(6695,4624)
MOSI1: U3.R9
MPLLCAP: C1.2 U3.P17 | length 3046.8
  Top Layer w4: U3.P17@6397.48,4791.97 6397.48,4824.84 6397.48,5120 6414.48,5137 6664,5137 6668,5133 6668,4624 6685,4607 6705,4607 6710,4612 6710,4641 6719,4650 6771,4650 6782,4639 6782,4456 6632,4306 6632,3984 6550,3902 6550,3774 6577,3747 6625,3747 6640,3732 6640,3200 C1.2@6760,3080
NBUS_OE: U6.19 U8.19 U10.6 | length 2367.4
  Top Layer w4: v1(3502,3065) U8.19@3564.57,3065 ; v1(3502,3725) U6.19@3564.57,3725 3643,3725 3662,3744 3662,4114 4027,4479 4027,4947 U10.6@4105,5025
  Mid-Layer3 w4: v1(3502,3065) 3517,3080 3517,3497 3502,3512 v1(3502,3725)
NetC25_1: C25.1 R12.1 R13.1 | length 1175
  Top Layer w4: R12.1@3149.58,5950.47 3248,5950.47 3312,5886.47 3312,5697 3328,5681 3428.26,5681 3445.26,5664 3445.26,5536 ; C25.1@3445.26,5498.79 3445.26,5536 ; v1(3539,5560) 3469.26,5560 3445.26,5536 ; v1(3887,5560) 3887.47,5560.47 R13.1@3919.58,5560.47
  Mid-Layer2 w4: v1(3539,5560) v1(3887,5560)
NetC28_1: C28.1 R14.2 R15.2 | length 5304.4
  Top Layer w4: v1(4295,4077) R14.2@4295,4120 ; v1(4991,5594) v1(4991,5344.74) C28.1@5023.79,5344.74 ; v1(7972,5955) R15.2@8015,5955
  Mid-Layer2 w4: v1(4991,5594) 7217,5594 7232,5609 7232,5787 7178,5841 7178,5905 7208,5935 7952,5935 v1(7972,5955)
  Mid-Layer3 w4: v1(4295,4077) 4301.91,4083.91 4301.91,4214.91 4991,4904 v1(4991,5344.74)
NetC29_1: C29.1 R19.2 R20.2 R21.2 | length 2284.8
  Top Layer w4: R19.2@3175,5705 v1(3224,5705) ; v1(3476,5525) 3567.09,5433.91 C29.1@3620.23,5433.91 ; R20.2@4205,6565 4370,6400 v1(4370,6248) R21.2@4370,6205
  Mid-Layer2 w4: v1(3224,5705) 3296,5705 ; v1(3476,5525) 3296,5705 ; v1(4370,6248) 3827,5705 3296,5705
NetC40_1: C40.1 U18.1 | length 238.1
  Top Layer w4: C40.1@4598.79,5724.74 v1(4632,5724.74) ; U18.1@4705.44,5550.31 v1(4705.44,5651.3)
  Mid-Layer2 w4: v1(4632,5724.74) v1(4705.44,5651.3)
NetC40_2: C40.2 U18.3 | length 262.7
  Top Layer w4: C40.2@4598.79,5784.74 4568,5753.95 4568,5656 4605.44,5618.56 U18.3@4605.44,5550.31
NetC41_1: C41.1 U18.4 | length 1866.8
  Top Layer w4: U18.4@4555.44,5550.31 v1(4555.44,5611.44) ; v1(5719.74,6689) C41.1@5719.74,6721.21
  Mid-Layer3 w4: v1(4555.44,5611.44) 4647,5703 4647,5735 5338,6426 5338,6672 5355,6689 v1(5719.74,6689)
NetC41_2: C41.2 U18.5 | length 1892.9
  Top Layer w4: U18.5@4505.44,5550.31 4505.44,5507 v1(4526,5507) ; v1(5779.74,6688) C41.2@5779.74,6721.21
  Mid-Layer3 w4: v1(4526,5507) 5227,6208 5390,6208 5406,6224 5406,6314.26 v1(5779.74,6688)
NetC42_2: C42.2 U18.2 | length 4909.7
  Top Layer w4: U18.2@4655.44,5550.31 4655.44,5594.44 v1(4679.56,5594.44) ; v1(8751,3814.74) C42.2@8783.79,3814.74
  Bottom Layer w4: v1(4679.56,5594.44) 4869.56,5594.44 5501,4963 6159,4963 6168,4954 7611.74,4954 v1(8751,3814.74)
NetC43_1: C43.1 U18.6 | length 4040.9
  Top Layer w4: U18.6@4455.44,5550.31 v1(4455.44,5603) ; v1(8252.89,5334.74) C43.1@8293.79,5334.74
  Mid-Layer2 w4: v1(4455.44,5603) 4704.44,5354 4795,5354 4861,5288 8206.16,5288 v1(8252.89,5334.74)
NetC50_1: C50.1 U11.44 X3.1 | length 2191.6
  Top Layer w4: U11.44@4410.47,3821.42 4410.47,3876.76 4440,3906.28 v1(4440,3923.63) ; v1(4971,3425) 4971.26,3424.74 C50.1@5003.79,3424.74
  Mid-Layer2 w4: v1(3942,3922) 4438.37,3922 v1(4440,3923.63)
  Mid-Layer3 w4: X3.1@3905.31,4430.47 3942,4393.78 v1(3942,3922) ; v1(4440,3923.63) 4435,3918.63 4435,3824 4479,3780 4479,3704 4513,3670 4513,3409 4523,3399 4945,3399 v1(4971,3425)
NetC51_1: C51.1 U11.43 X3.2 | length 2441.8
  Top Layer w4: v1(4430.16,3767.08) U11.43@4430.16,3821.42 ; v1(5094.26,3373) 5146,3424.74 C51.1@5178.79,3424.74
  Mid-Layer3 w4: X3.2@3708.31,4430.47 3888,4250.78 3888,3911 3904,3895 3967,3895 4248,3614 4375,3614 ; v1(4430.16,3767.08) 4393,3729.92 4393,3632 4375,3614 ; v1(5094.26,3373) 4502,3373 4483,3392 4483,3533 4402,3614 4375,3614
NetD1_1: D1.1 R22.2 | length 148.1
  Top Layer w4: R22.2@5229.58,5790.47 5299,5790.47 5304.34,5785.13 D1.1@5375.5,5785.13